# EAGLE board myschematic (EAGLE 4.15)
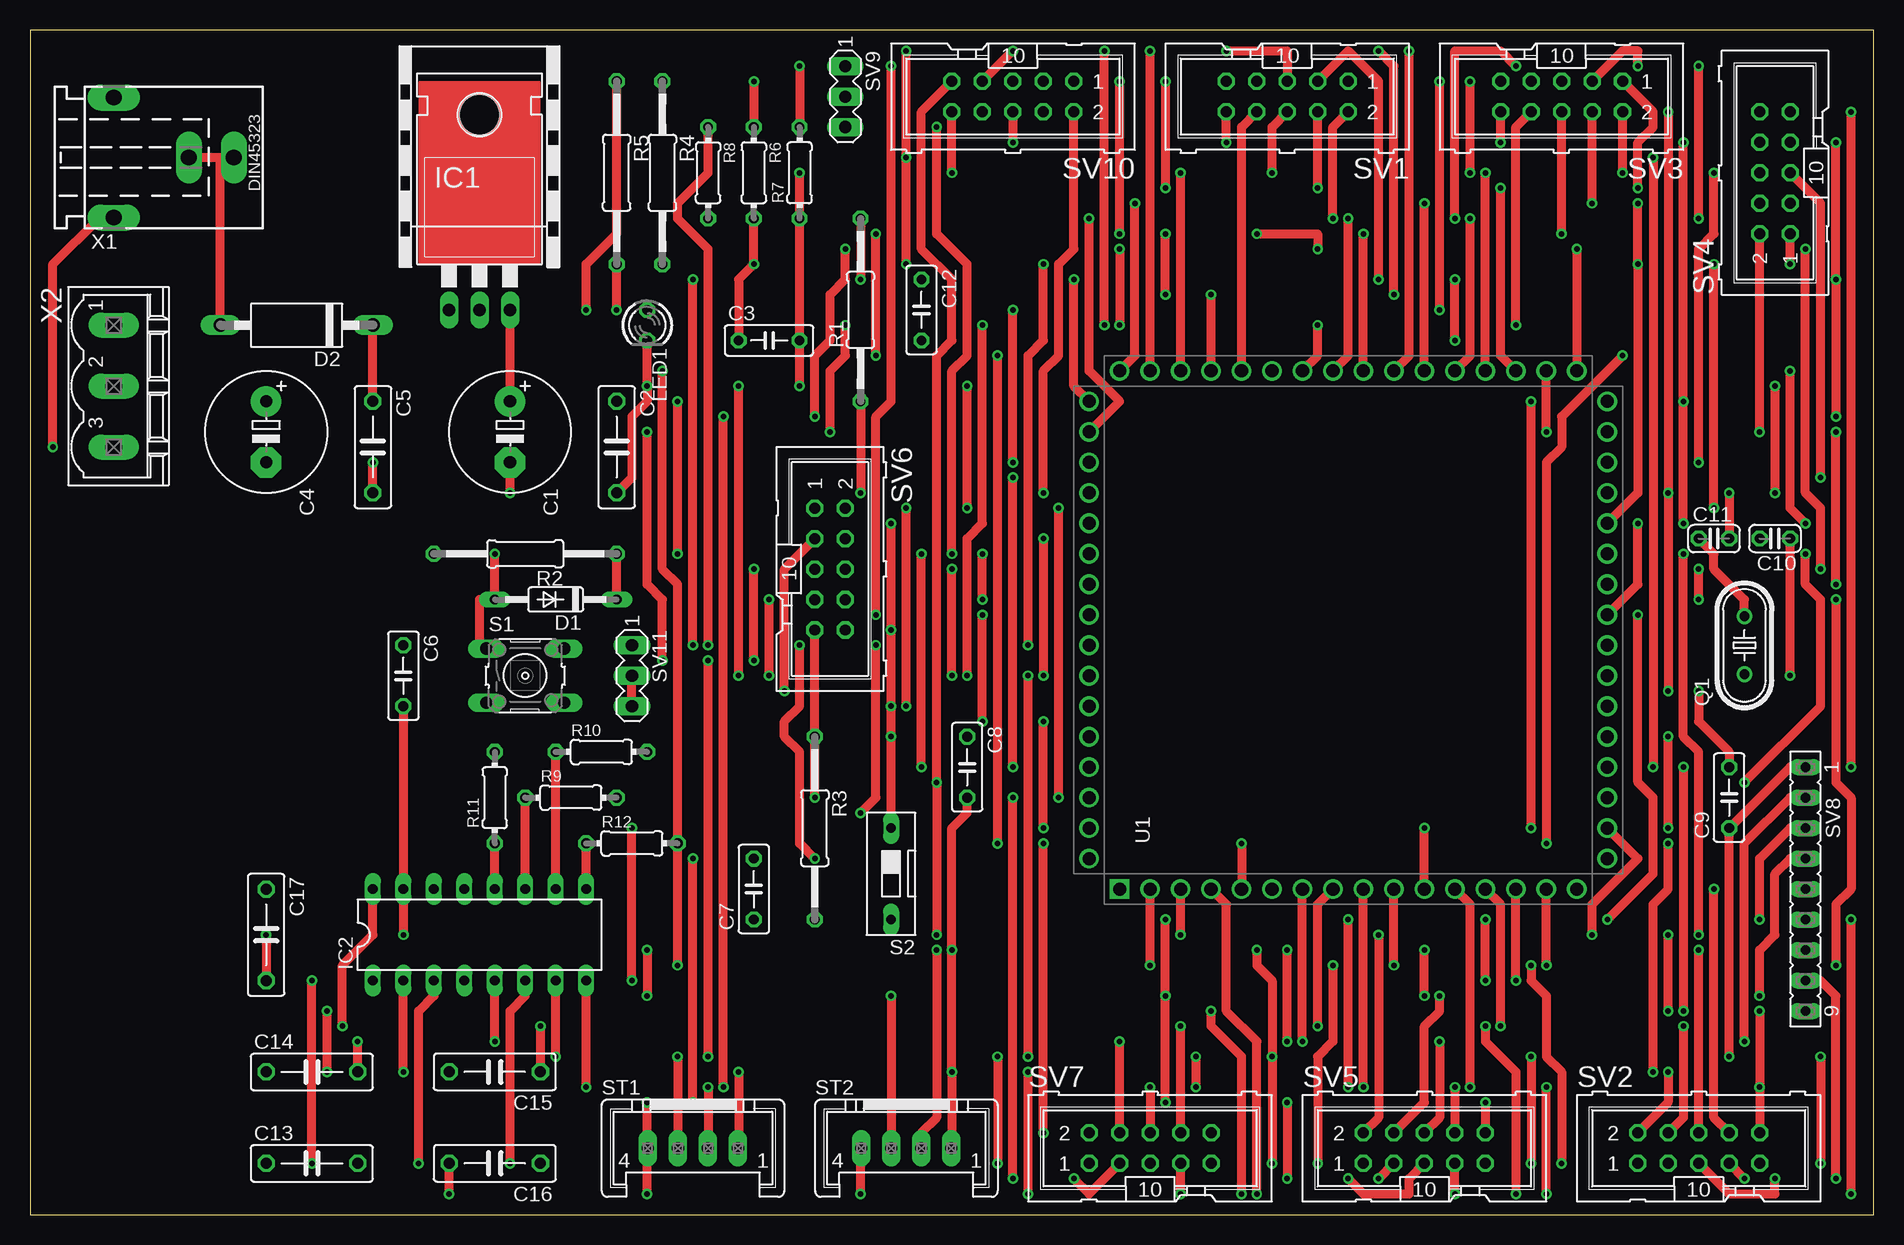
[diagram p0: board, top side]
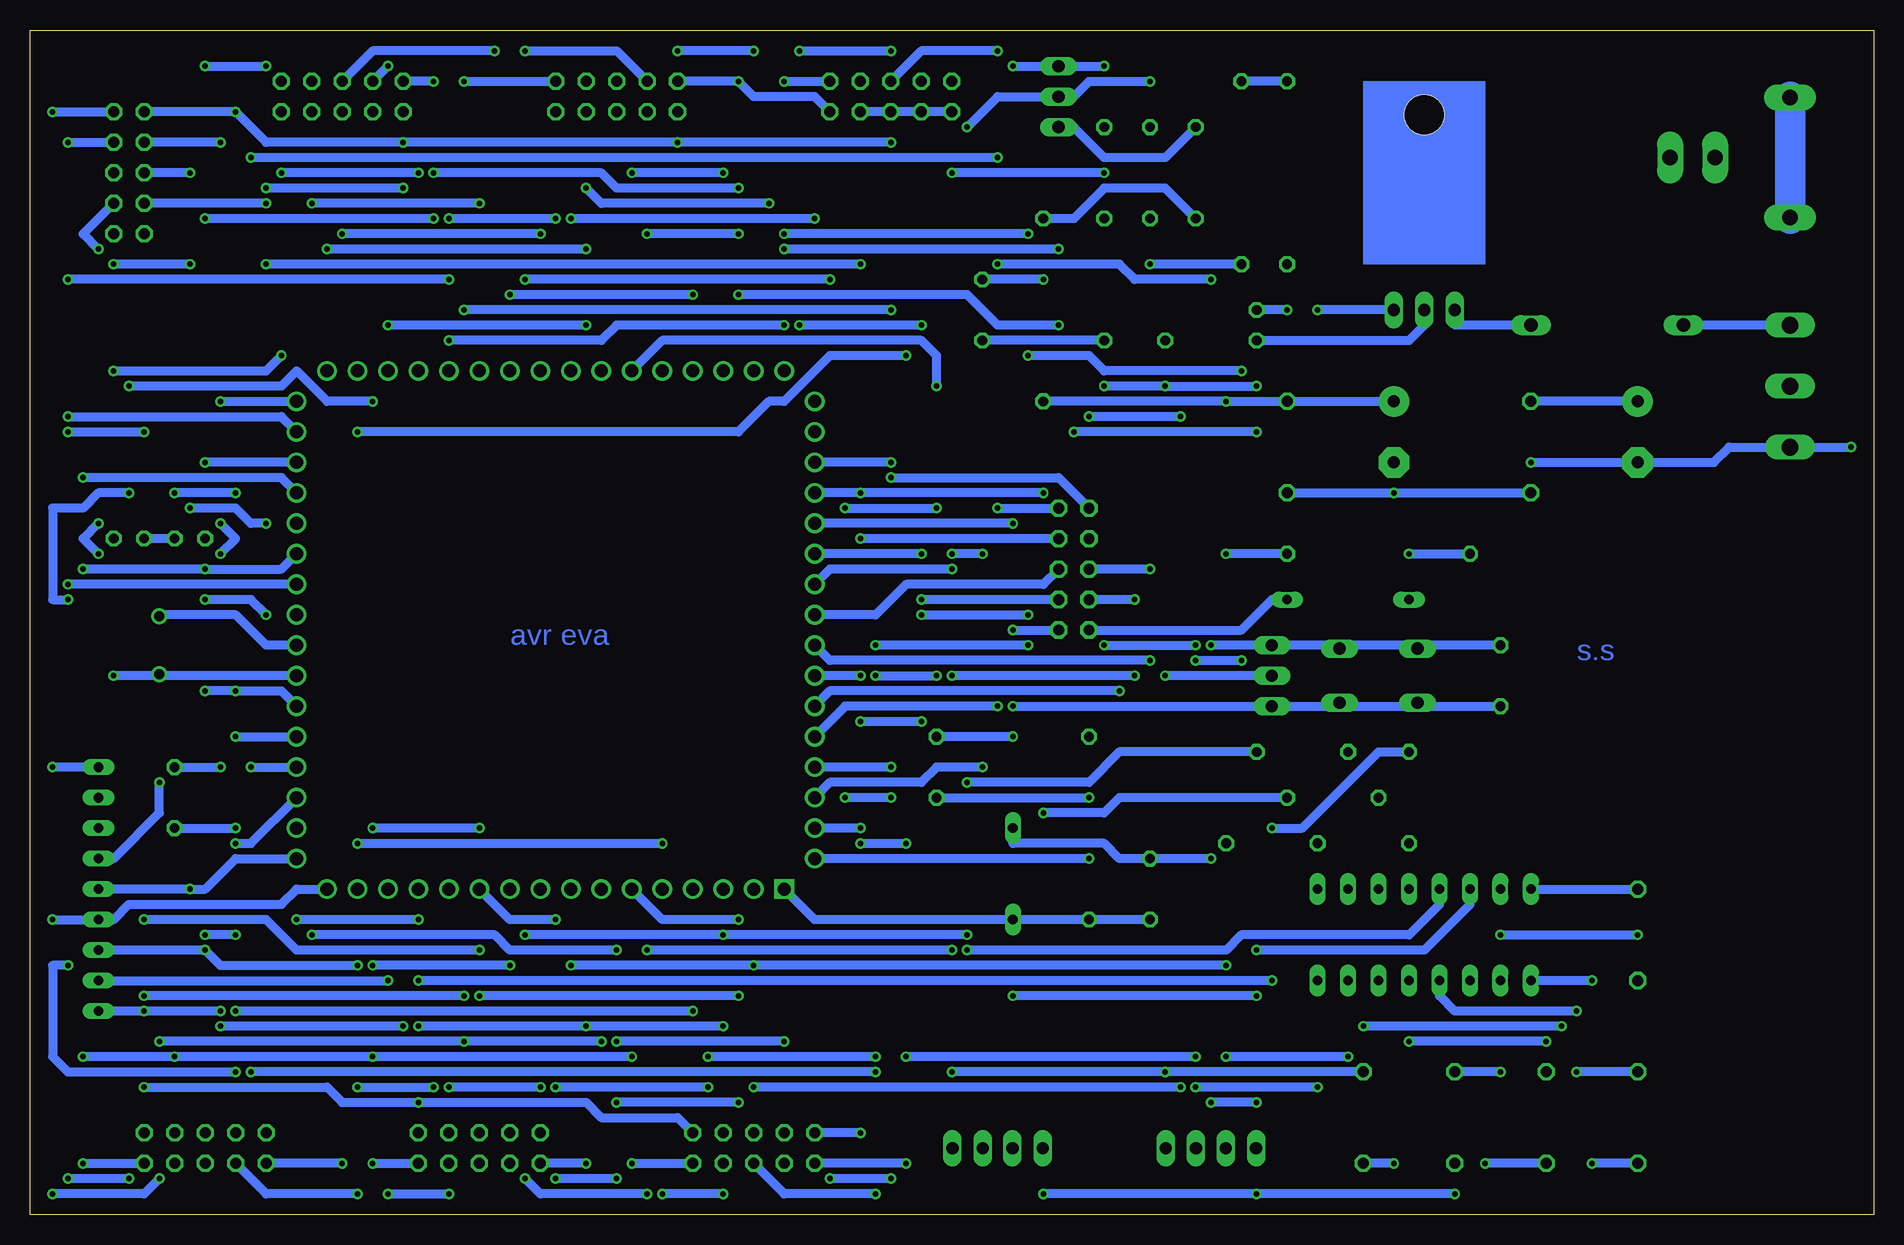
[diagram p1: board, bottom side, seen from below]

Size 153.65 x 98.73 mm. Coordinates in mm from the lower left corner, seen from the top.
Outline: 0,0 153.65,0 153.65,98.73 0,98.73 0,0
Copper layers (1*16): Top 0.035mm / dielectric 1.5mm / Bottom 0.035mm
Design rules "default": minimum track width 30mil, minimum drill 18mil, track to track 16mil, track to pad 16mil, pad to pad 16mil, via to via 16mil, smd to smd 8mil, copper to edge 20mil, drill to drill 8mil, minimum pad ring 10mil, minimum via ring 8mil, stop-mask expansion 1mil, vias tented up to drill 4mil, thermal gap 25mil
Net classes: 0 default: width 0.102 mm, drill 0.025 mm, clearance 0.025 mm
tRestrict: area 1.9,1.7 to 14.6,55.1; area 29.8,77.9 to 45.1,98.3; area 14.6,30.9 to 23.5,55.1
bRestrict: area 1.9,1.7 to 14.6,55.1; area 29.8,77.9 to 45.1,98.3; area 14.6,30.9 to 23.5,55.1
vRestrict: area 1.9,1.7 to 14.6,55.1; area 29.8,77.9 to 45.1,98.3; area 14.6,30.9 to 23.5,55.1

## Footprints (pad centres in the part's own frame; a part is rotated, then mirrored left to right if it is on the bottom)
E5-10,5 = drill 1.016 pad 2.54 round: + -2.54,0 | drill 1.016 pad 2.54 octagon: - 2.54,0
C075-032X103 = drill 0.914 octagon: 1 -3.81,0; 2 3.81,0
C050-025X075 = drill 0.813 octagon: 1 -2.54,0; 2 2.54,0
C025-024X044 = drill 0.813 octagon: 1 -1.27,0; 2 1.27,0
DO35-10 = drill 0.813 long: A 5.08,0; C -5.08,0
DO15-12 = drill 1.118 long: A 6.35,0; C -6.35,0
78XXH = drill 1.016 long: GND 0,-5.08; IN -2.54,-5.08; OUT 2.54,-5.08 | hole 3.302: 0,11.176
DIL16 = drill 0.813 long: 1 -8.89,-3.81; 2 -6.35,-3.81; 3 -3.81,-3.81; 4 -1.27,-3.81; 5 1.27,-3.81; 6 3.81,-3.81; 7 6.35,-3.81; 8 8.89,-3.81; 9 8.89,3.81; 10 6.35,3.81; 11 3.81,3.81; 12 1.27,3.81; 13 -1.27,3.81; 14 -3.81,3.81; 15 -6.35,3.81; 16 -8.89,3.81
LED3MM = drill 0.813 octagon: A -1.27,0; K 1.27,0
HC49U-V = drill 0.813 round: 1 -2.413,0; 2 2.413,0
0207/15 = drill 0.813 octagon: 1 -7.62,0; 2 7.62,0
0204/7 = drill 0.813 octagon: 1 -3.81,0; 2 3.81,0
B3F-10XX = drill 1.016 long: 1 -3.251,2.261; 2 3.251,2.261; 3 -3.251,-2.261; 4 3.251,-2.261
DS-01 = drill 0.813 long: 1 0,-3.81; 2 0,3.81
MSF4 = drill 1.016 long: 1 3.759,-2.54; 2 1.245,-2.54; 3 -1.245,-2.54; 4 -3.759,-2.54
ML10 = drill 0.914 octagon: 1 -5.08,-1.27; 2 -5.08,1.27; 3 -2.54,-1.27; 4 -2.54,1.27; 5 0,-1.27; 6 0,1.27; 7 2.54,-1.27; 8 2.54,1.27; 9 5.08,-1.27; 10 5.08,1.27
FE09 = drill 0.813 long: 1 -10.16,0; 2 -7.62,0; 3 -5.08,0; 4 -2.54,0; 5 0,0; 6 2.54,0; 7 5.08,0; 8 7.62,0; 9 10.16,0
MA03-1 = drill 1.016 long: 1 -2.54,0; 2 0,0; 3 2.54,0
HEADER_SQR64_43 = drill 1.092 square: 1 -21.59,19.05 | drill 1.092 round: 2 -21.59,16.51; 3 -21.59,13.97; 4 -21.59,11.43; 5 -21.59,8.89; 6 -21.59,6.35; 7 -21.59,3.81; 8 -21.59,1.27; 9 -21.59,-1.27; 10 -21.59,-3.81; 11 -21.59,-6.35; 12 -21.59,-8.89; 13 -21.59,-11.43; 14 -21.59,-13.97; 15 -21.59,-16.51; 16 -21.59,-19.05; 17 -19.05,-21.59; 18 -16.51,-21.59; 19 -13.97,-21.59; 20 -11.43,-21.59; 21 -8.89,-21.59; 22 -6.35,-21.59; 23 -3.81,-21.59; 24 -1.27,-21.59; 25 1.27,-21.59; 26 3.81,-21.59; 27 6.35,-21.59; 28 8.89,-21.59; 29 11.43,-21.59; 30 13.97,-21.59; 31 16.51,-21.59; 32 19.05,-21.59; 33 21.59,-19.05; 34 21.59,-16.51; 35 21.59,-13.97; 36 21.59,-11.43; 37 21.59,-8.89; 38 21.59,-6.35; 39 21.59,-3.81; 40 21.59,-1.27; 41 21.59,1.27; 42 21.59,3.81; 43 21.59,6.35; 44 21.59,8.89; 45 21.59,11.43; 46 21.59,13.97; 47 21.59,16.51; 48 21.59,19.05; 49 19.05,21.59; 50 16.51,21.59; 51 13.97,21.59; 52 11.43,21.59; 53 8.89,21.59; 54 6.35,21.59; 55 3.81,21.59; 56 1.27,21.59; 57 -1.27,21.59; 58 -3.81,21.59; 59 -6.35,21.59; 60 -8.89,21.59; 61 -11.43,21.59; 62 -13.97,21.59; 63 -16.51,21.59; 64 -19.05,21.59
737992-5 = drill 1.3 pad 2.184 long: + 0,10; -1 5,0; -2 -5,0; K 0,6.25
MSTBV3 = drill 1.397 long: 1 -5.08,0; 2 0,0; 3 5.08,0

## Placement (x,y rotation side)
C1  [E5-10,5]  40,65.24 270 top
C2  [C075-032X103]  48.89,63.97 270 top
C3  [C050-025X075]  61.59,72.86 0 top
C4  [E5-10,5]  19.68,65.24 270 top
C5  [C075-032X103]  28.57,63.97 270 top
C6  [C050-025X075]  31.11,44.92 270 top
C7  [C050-025X075]  60.32,27.14 90 top
C8  [C050-025X075]  78.1,37.3 270 top
C9  [C050-025X075]  141.6,34.76 90 top
C10  [C025-024X044]  145.41,56.35 180 top
C11  [C025-024X044]  140.33,56.35 0 top
C12  [C050-025X075]  74.29,75.4 270 top
C13  [C075-032X103]  23.49,4.28 0 top
C14  [C075-032X103]  23.49,11.9 0 top
C15  [C075-032X103]  38.73,11.9 180 top
C16  [C075-032X103]  38.73,4.28 180 top
C17  [C075-032X103]  19.68,23.33 270 top
D1  1N4148  [DO35-10]  43.81,51.27 180 top
D2  1N5060GP  [DO15-12]  22.22,74.13 180 top
IC1  REG  [78XXH]  37.46,80.48 0 top
IC2  MAX232  [DIL16]  37.46,23.33 0 top
LED1  [LED3MM]  51.43,74.13 270 top
Q1  [HC49U-V]  142.87,47.46 90 top
R1  [0207/15]  69.21,75.4 90 top
R2  [0207/15]  41.27,55.08 180 top
R3  [0207/15]  65.4,32.22 270 top
R4  [0207/15]  52.7,86.83 270 top
R5  [0207/15]  48.89,86.83 270 top
R6  [0204/7]  60.32,86.83 270 top
R7  [0204/7]  64.13,86.83 90 top
R8  [0204/7]  56.51,86.83 270 top
R9  [0204/7]  45.08,34.76 0 top
R10  [0204/7]  47.62,38.57 0 top
R11  [0204/7]  38.73,34.76 90 top
R12  [0204/7]  50.16,30.95 0 top
S1  [B3F-10XX]  41.27,44.92 0 top
S2  [DS-01]  71.75,28.41 180 top
ST1  MSF4  [MSF4]  55.24,8.09 0 top
ST2  MSF4  [MSF4]  73.02,8.09 0 top
SV1  PORTA  [ML10]  104.77,93.18 180 top
SV2  PORTB  [ML10]  139.06,5.55 0 top
SV3  PORTC  [ML10]  127.63,93.18 180 top
SV4  PORTD  [ML10]  145.41,86.83 90 top
SV5  PORTE  [ML10]  116.2,5.55 0 top
SV6  PORTF  [ML10]  66.67,53.81 270 top
SV7  PORTG/T  [ML10]  93.34,5.55 0 top
SV8  OC  [FE09]  147.95,27.14 270 top
SV9  [MA03-1]  67.94,93.18 270 top
SV10  PROG  [ML10]  81.91,93.18 180 top
SV11  RESET  [MA03-1]  50.16,44.92 270 top
U1  ATMEGA128_SINGLE64_43  [HEADER_SQR64_43]  109.85,48.73 90 top
X1  [737992-5]  6.98,88.1 270 top
X2  MSTBV3  [MSTBV3]  6.98,69.05 270 top

## Library data of the parts
C1-C17 R1-R12 = rcl
D1 D2 = diode
IC1 = 78xx_with_heatsink
IC2 = maxim
LED1 = led
Q1 = crystal
S1 = switch-omron
S2 = switch-dil
ST1 ST2 = con-lumberg
SV1-SV7 SV10 = con-harting-ml
SV8 = con-lsta
SV9 SV11 = con-lstb
U1 = atmel_prototype_header
X1 = con-conrad
X2 = con-phoenix-508

## Nets
AGND: R7.2 SV9.1 U1.63
AL: D2.A X1.+ X1.K X2.1
AREF: R6.1 SV9.2 U1.62
AVCC: R8.1 SV9.3 U1.64
C1+: C13.1 IC2.1
C1-: C13.2 IC2.3
C2+: C14.1 IC2.4
C2-: C14.2 IC2.5
GND: C1.- C2.2 C3.2 C4.- C5.2 C6.2 C7.2 C8.1 C9.2 C10.2 C11.2 C12.2 C16.2 C17.2 IC1.GND IC2.15 LED1.K R7.1 S1.3 S1.4 S2.1 ST1.4 ST2.4 SV1.10 SV2.10 SV3.10 SV4.10 SV5.10 SV6.10 SV7.10 SV8.9 SV10.4 SV10.6 SV10.8 SV10.10 SV11.2 SV11.3 U1.22 U1.53 X1.-1 X2.3
LED: LED1.A R5.2
PA0: SV1.1 U1.51
PA1: SV1.2 U1.50
PA2: SV1.3 U1.49
PA3: SV1.4 U1.48
PA4: SV1.5 U1.47
PA5: SV1.6 U1.46
PA6: SV1.7 U1.45
PA7: SV1.8 U1.44
PB0: SV2.1 U1.10
PB1: SV2.2 SV10.7 U1.11
PB2: SV2.3 U1.12
PB3: SV2.4 U1.13
PB4: SV2.5 SV8.8 U1.14
PB5: SV2.6 SV8.7 U1.15
PB6: SV2.7 SV8.6 U1.16
PB7: SV2.8 SV8.5 U1.17
PC0: SV3.1 U1.35
PC1: SV3.2 U1.36
PC2: SV3.3 U1.37
PC3: SV3.4 U1.38
PC4: SV3.5 U1.39
PC5: SV3.6 U1.40
PC6: SV3.7 U1.41
PC7: SV3.8 U1.42
PD0: SV4.1 U1.25
PD1: SV4.2 U1.26
PD2: R11.2 SV4.3 U1.27
PD3: R9.2 SV4.4 U1.28
PD4: SV4.5 U1.29
PD5: SV4.6 U1.30
PD6: SV4.7 SV7.6 U1.31
PD7: SV4.8 SV7.7 U1.32
PE0: R12.2 SV5.1 SV10.1 U1.2
PE1: R10.2 SV5.2 SV10.9 U1.3
PE2: SV5.3 U1.4
PE3: SV5.4 SV8.4 U1.5
PE4: SV5.5 SV8.3 U1.6
PE5: SV5.6 SV8.2 U1.7
PE6: SV5.7 SV7.8 U1.8
PE7: SV5.8 U1.9
PEN: C7.1 R3.2 S2.2 U1.1
PF0: SV6.1 U1.61
PF1: SV6.2 U1.60
PF2: SV6.3 U1.59
PF3: SV6.4 U1.58
PF4: SV6.5 U1.57
PF5: SV6.6 U1.56
PF6: SV6.7 U1.55
PF7: SV6.8 U1.54
PG0: SV7.1 U1.33
PG1: SV7.2 U1.34
PG2: SV7.3 U1.43
PG3: SV7.4 U1.18
PG4: SV7.5 U1.19
R1IN: IC2.13 ST2.2
R1OUT: IC2.12 R11.1
R2IN: IC2.8 ST1.2
R20OUT: IC2.9 R12.1
RECT: C4.+ C5.1 D2.C IC1.IN
REF: C3.1 R4.2 R6.2
RESET: C6.1 D1.A R2.2 S1.1 S1.2 SV10.5 SV11.1 U1.20
T1IN: IC2.11 R9.1
T1OUT: IC2.14 ST2.3
T2IN: IC2.10 R10.1
T2OUT: IC2.7 ST1.3
V+: C15.2 IC2.2
V-: C16.1 IC2.6
VCC: C1.+ C2.1 C8.2 C9.1 C15.1 C17.1 D1.C IC1.OUT IC2.16 R1.1 R2.1 R3.1 R4.1 R5.1 ST1.1 ST2.1 SV1.9 SV2.9 SV3.9 SV4.9 SV5.9 SV6.9 SV7.9 SV8.1 SV10.2 U1.21 U1.52
VCCREF: C12.1 R1.2 R8.2
XTAL1: C11.1 Q1.2 U1.24
XTAL2: C10.1 Q1.1 U1.23

## Tracks (layer width: path | path; a pad name or v marks a point on that pad's centre or on a via)
AGND  (via drill 0.46)
  Top 0.762: v64.13,95.72 R7.2 | v84.45,32.22 v84.45,41.11 | v79.37,41.11 v79.37,50 | v70.48,50 70.48,66.51 71.75,67.78 v71.75,95.72
  Bottom 0.762: v64.13,95.72 SV9.1 v71.75,95.72 | v84.45,32.22 U1.63 | v84.45,41.11 v79.37,41.11 | v79.37,50 v70.48,50
AL
  Top 0.762: 15.87,88.1 X1.+ 17.14,88.1 | 15.87,88.1 X1.K | D2.A 15.87,88.1
  Bottom 0.762: X2.1 D2.A
AREF  (via drill 0.46)
  Top 0.762: v60.32,94.45 R6.1 | v74.29,37.3 v74.29,55.08 | v76.83,55.08 76.83,70.32 78.1,71.59 78.1,79.21 75.56,81.75 v75.56,90.64
  Bottom 0.762: v60.32,94.45 65.4,94.45 66.67,93.18 SV9.2 73.02,93.18 v75.56,90.64 | U1.62 86.99,36.03 79.37,36.03 78.1,37.3 v74.29,37.3 | v74.29,55.08 v76.83,55.08
AVCC  (via drill 0.46)
  Top 0.762: v65.4,29.68 64.13,30.95 64.13,38.57 62.86,39.84 62.86,41.11 64.13,42.38 v64.13,47.46 | v56.51,47.46 56.51,80.48 53.97,83.02 53.97,84.29 56.51,86.83 R8.1
  Bottom 0.762: R8.1 59.05,88.1 64.13,88.1 66.67,90.64 SV9.3 | v65.4,29.68 U1.64 | v64.13,47.46 v56.51,47.46
C1+  (via drill 0.46)
  Top 0.762: v23.49,4.28 v23.49,19.52
  Bottom 0.762: v23.49,19.52 IC2.1 | C13.1 v23.49,4.28
C1-  (via drill 0.46)
  Top 0.762: v32.38,4.28 32.38,16.98 33.65,18.25 IC2.3
  Bottom 0.762: C13.2 v32.38,4.28
C2+  (via drill 0.46)
  Top 0.762: v24.76,11.9 v24.76,16.98
  Bottom 0.762: v24.76,16.98 34.92,16.98 36.19,18.25 IC2.4 | C14.1 v24.76,11.9
C2-  (via drill 0.46)
  Top 0.762: C14.2 v27.3,14.44 | v38.73,14.44 IC2.5
  Bottom 0.762: v27.3,14.44 v38.73,14.44
GND  (via drill 0.46)
  Top 0.762: v136.52,43.65 v136.52,60.16 v136.52,91.91 | v141.6,60.16 C11.2 | v121.28,9.36 SV5.10 | v137.79,37.3 v137.79,16.98 | v144.14,16.98 v144.14,10.63 SV2.10 | v139.06,43.65 139.06,41.11 141.6,38.57 C9.2 | SV11.3 SV11.2 | C6.2 IC2.15 v31.11,23.33 | v19.68,23.33 C17.2 | v34.92,1.74 C16.2 | v51.43,1.74 51.43,4.28 ST1.4 51.43,6.82 v51.43,9.36 | v69.21,1.74 69.21,4.28 ST2.4 | S2.1 v71.75,39.84 v71.75,42.38 v71.75,48.73 v71.75,57.62 | v55.24,9.36 v55.24,29.68 | v40,60.16 C1.- | v1.9,63.97 1.9,79.21 5.71,83.02 X1.-1 | C5.2 v28.57,62.7 | v99.69,89.37 SV1.10 | SV10.6 v81.91,89.37 | v122.55,89.37 SV3.10 | LED1.K v51.43,69.05 51.43,67.78 50.16,66.51 50.16,61.43 C2.2 | v64.13,69.05 C3.2 R7.1 v64.13,86.83 | v76.83,86.83 SV10.10 | v59.05,44.92 v59.05,69.05
  Bottom 0.762: C11.2 C10.2 | SV4.10 v136.52,91.91 133.98,89.37 v122.55,89.37 v99.69,89.37 v81.91,89.37 | U1.22 132.71,43.65 v136.52,43.65 v139.06,43.65 | v136.52,60.16 v141.6,60.16 | SV7.10 99.69,8.09 106.04,8.09 107.31,9.36 v121.28,9.36 127.63,9.36 128.9,10.63 v144.14,10.63 | C9.2 v137.79,37.3 | v137.79,16.98 v144.14,16.98 SV8.9 | v31.11,23.33 v19.68,23.33 | C6.2 37.46,42.38 S1.3 38.73,42.38 43.81,42.38 S1.4 45.08,42.38 SV11.3 v71.75,42.38 | v34.92,1.74 v51.43,1.74 v69.21,1.74 | v71.75,48.73 SV6.10 | S2.1 71.75,30.95 64.13,30.95 62.86,29.68 C7.2 v55.24,29.68 | v71.75,39.84 C8.1 | v71.75,57.62 U1.53 | v51.43,9.36 v55.24,9.36 | C2.2 v40,60.16 C5.2 | v1.9,63.97 X2.3 12.06,63.97 13.33,62.7 C4.- v28.57,62.7 | SV10.10 SV10.8 SV10.6 SV10.4 | v64.13,69.05 v59.05,69.05 v51.43,69.05 | C3.2 C12.2 | LED1.K 38.73,72.86 37.46,74.13 IC1.GND | v64.13,86.83 v76.83,86.83 | SV11.2 v59.05,44.92
LED  (via drill 0.46)
  Top 0.762: v48.89,75.4 R5.2
  Bottom 0.762: v48.89,75.4 LED1.A
N$58
  Bottom 2.54: 6.98,83.02 6.98,93.18
PA0  (via drill 0.46)
  Top 0.762: v117.47,75.4 v117.47,94.45 | v81.91,62.7 v81.91,75.4
  Bottom 0.762: v117.47,94.45 SV1.1 | v81.91,75.4 v117.47,75.4 | v81.91,62.7 U1.51
PA1  (via drill 0.46)
  Top 0.762: SV1.2 108.58,90.64 v108.58,83.02 | v88.26,83.02 88.26,70.32 90.8,67.78 U1.50
  Bottom 0.762: v88.26,83.02 v108.58,83.02
PA2  (via drill 0.46)
  Top 0.762: SV1.3 109.85,96.99 112.39,94.45 v112.39,77.94 | v86.99,77.94 86.99,69.05 U1.49
  Bottom 0.762: v86.99,77.94 v112.39,77.94
PA3  (via drill 0.46)
  Top 0.762: U1.48 92.07,71.59 v92.07,84.29 | v107.31,85.56 SV1.4
  Bottom 0.762: v92.07,84.29 106.04,84.29 v107.31,85.56
PA4  (via drill 0.46)
  Top 0.762: U1.47 v93.34,96.99 | v99.69,96.99 104.77,96.99 SV1.5
  Bottom 0.762: v93.34,96.99 v99.69,96.99
PA5  (via drill 0.46)
  Top 0.762: U1.46 v95.88,86.83 | v103.5,86.83 103.5,90.64 SV1.6
  Bottom 0.762: v95.88,86.83 v103.5,86.83
PA6  (via drill 0.46)
  Top 0.762: U1.45 v98.42,76.67 | v113.66,76.67 113.66,95.72 v112.39,96.99
  Bottom 0.762: v98.42,76.67 v113.66,76.67 | v112.39,96.99 104.77,96.99 SV1.7
PA7
  Top 0.762: U1.44 100.96,90.64 SV1.8
PB0  (via drill 0.46)
  Top 0.762: v127.63,4.28 127.63,11.9 126.36,13.17 126.36,18.25 125.09,19.52 v125.09,20.79 | v113.66,20.79 U1.10
  Bottom 0.762: v127.63,4.28 SV2.1 | v113.66,20.79 v125.09,20.79
PB1  (via drill 0.46)
  Top 0.762: v109.85,10.63 v109.85,24.6 | v97.15,13.17 v97.15,10.63 | v83.18,13.17 v83.18,44.92 | v78.1,44.92 78.1,56.35 79.37,57.62 v79.37,74.13 | v89.53,74.13 v89.53,96.99 | v81.91,96.99 SV10.7 | SV2.2 136.52,9.36 v136.52,11.9 | v150.49,20.79 150.49,25.87 151.76,27.14 151.76,34.76 150.49,36.03 v150.49,51.27 | v145.41,69.05 v145.41,60.16 | v125.09,32.22 v125.09,67.78 | U1.11 v116.2,32.22
  Bottom 0.762: U1.11 113.66,24.6 v109.85,24.6 | v97.15,10.63 v109.85,10.63 | v83.18,13.17 v97.15,13.17 | v83.18,44.92 v78.1,44.92 | v79.37,74.13 v89.53,74.13 | v89.53,96.99 v81.91,96.99 | v136.52,11.9 150.49,11.9 151.76,13.17 151.76,20.79 v150.49,20.79 | v150.49,51.27 151.76,51.27 151.76,58.89 149.22,58.89 147.95,60.16 v145.41,60.16 | v145.41,69.05 132.71,69.05 131.44,70.32 128.9,67.78 v125.09,67.78 | v116.2,32.22 v125.09,32.22
PB2  (via drill 0.46)
  Top 0.762: v126.36,1.74 v126.36,10.63 | v120.01,10.63 120.01,25.87 U1.12
  Bottom 0.762: SV2.3 133.98,1.74 v126.36,1.74 | v126.36,10.63 v120.01,10.63
PB3  (via drill 0.46)
  Top 0.762: SV2.4 137.79,8.09 v137.79,15.71 | v122.55,15.71 122.55,25.87 U1.13
  Bottom 0.762: v122.55,15.71 v137.79,15.71
PB4  (via drill 0.46)
  Top 0.762: v123.82,19.52 U1.14 | SV2.5 141.6,1.74 145.41,1.74 v145.41,3.01 | v150.49,3.01 150.49,18.25 149.22,19.52 SV8.8
  Bottom 0.762: SV8.8 v123.82,19.52 | v145.41,3.01 v150.49,3.01
PB5  (via drill 0.46)
  Top 0.762: SV2.6 v139.06,22.06 | v126.36,20.79 U1.15
  Bottom 0.762: SV8.7 v139.06,22.06 137.79,20.79 v126.36,20.79
PB6  (via drill 0.46)
  Top 0.762: SV2.7 v142.87,3.01 | v151.76,1.74 v151.76,24.6
  Bottom 0.762: U1.16 131.44,27.14 132.71,25.87 145.41,25.87 146.68,24.6 SV8.6 v151.76,24.6 | v142.87,3.01 144.14,1.74 v151.76,1.74
PB7  (via drill 0.46)
  Top 0.762: SV2.8 140.33,8.09 v140.33,27.14
  Bottom 0.762: U1.17 136.52,29.68 139.06,27.14 v140.33,27.14 SV8.5
PC0  (via drill 0.46)
  Top 0.762: SV3.1 135.25,91.91 135.25,90.64 133.98,89.37 v133.98,85.56 | v122.55,85.56 122.55,71.59 U1.35
  Bottom 0.762: v122.55,85.56 v133.98,85.56
PC1  (via drill 0.46)
  Top 0.762: v132.71,86.83 SV3.2 | U1.36 v121.28,86.83
  Bottom 0.762: v121.28,86.83 v132.71,86.83
PC2  (via drill 0.46)
  Top 0.762: SV3.3 132.71,96.99 133.98,96.99 v133.98,95.72 | v139.06,83.02 v139.06,95.72 | v120.01,83.02 120.01,71.59 U1.37
  Bottom 0.762: v139.06,95.72 v133.98,95.72 | v120.01,83.02 v139.06,83.02
PC3  (via drill 0.46)
  Top 0.762: v130.17,84.29 SV3.4 | U1.38 v116.2,84.29
  Bottom 0.762: v116.2,84.29 v130.17,84.29
PC4  (via drill 0.46)
  Top 0.762: v114.93,96.99 114.93,71.59 U1.39
  Bottom 0.762: SV3.5 125.09,96.99 v114.93,96.99
PC5  (via drill 0.46)
  Top 0.762: v127.63,81.75 SV3.6 | U1.40 v111.12,81.75
  Bottom 0.762: v111.12,81.75 v127.63,81.75
PC6  (via drill 0.46)
  Top 0.762: v123.82,95.72 122.55,96.99 118.74,96.99 v118.74,83.02 | v109.85,83.02 109.85,71.59 U1.41
  Bottom 0.762: v123.82,95.72 SV3.7 | v109.85,83.02 v118.74,83.02
PC7  (via drill 0.46)
  Top 0.762: U1.42 107.31,71.59 v107.31,74.13 | v123.82,74.13 123.82,90.64 SV3.8
  Bottom 0.762: v107.31,74.13 v123.82,74.13
PD0  (via drill 0.46)
  Top 0.762: U1.25 133.98,52.54 v133.98,57.62 | v140.33,58.89 v140.33,79.21 | v146.68,79.21 SV4.1
  Bottom 0.762: v133.98,57.62 135.25,57.62 136.52,58.89 v140.33,58.89 | v140.33,79.21 v146.68,79.21
PD1  (via drill 0.46)
  Top 0.762: v144.14,65.24 SV4.2 | v150.49,52.54 v150.49,65.24
  Bottom 0.762: v150.49,65.24 v144.14,65.24 | U1.26 v150.49,52.54
PD2  (via drill 0.46)
  Top 0.762: v149.22,53.81 149.22,58.89 147.95,60.16 v147.95,80.48 | v50.16,19.52 v50.16,32.22 | v121.28,19.52 v121.28,24.6 | v131.44,24.6 135.25,28.41 135.25,34.76 133.98,36.03 v133.98,50 | v139.06,51.27 v139.06,53.81
  Bottom 0.762: U1.27 132.71,53.81 v139.06,53.81 v149.22,53.81 | v147.95,80.48 149.22,81.75 SV4.3 | R11.2 41.27,38.57 47.62,32.22 v50.16,32.22 | v50.16,19.52 v121.28,19.52 | v121.28,24.6 v131.44,24.6 | v133.98,50 135.25,51.27 v139.06,51.27
PD3  (via drill 0.46)
  Top 0.762: v69.21,33.49 70.48,34.76 v70.48,47.46 | v83.18,47.46 83.18,71.59 84.45,72.86 v84.45,79.21 | v133.98,84.29 v133.98,79.21 133.98,60.16 U1.28
  Bottom 0.762: R9.2 62.86,34.76 64.13,33.49 v69.21,33.49 | v70.48,47.46 v83.18,47.46 | v84.45,79.21 v133.98,79.21 | v133.98,84.29 SV4.4
PD4  (via drill 0.46)
  Top 0.762: SV4.5 149.22,84.29 v149.22,61.43
  Bottom 0.762: v149.22,61.43 132.71,61.43 U1.29
PD5  (via drill 0.46)
  Top 0.762: v140.33,86.83 140.33,81.75 139.06,80.48 v139.06,62.7
  Bottom 0.762: v140.33,86.83 SV4.6 | U1.30 v139.06,62.7
PD6  (via drill 0.46)
  Top 0.762: v150.49,89.37 v150.49,77.94 v150.49,66.51 | v93.34,10.63 SV7.6 | v57.78,10.63 v57.78,66.51 | v65.4,66.51 65.4,71.59 66.67,72.86 66.67,76.67 67.94,77.94 v67.94,80.48 | v90.8,80.48 v90.8,74.13 | v118.74,72.86 v118.74,77.94
  Bottom 0.762: U1.31 132.71,66.51 v150.49,66.51 | v150.49,89.37 SV4.7 | v57.78,10.63 v93.34,10.63 | v57.78,66.51 v65.4,66.51 | v67.94,80.48 v90.8,80.48 | v90.8,74.13 104.77,74.13 106.04,72.86 v118.74,72.86 | v118.74,77.94 v150.49,77.94
PD7  (via drill 0.46)
  Top 0.762: v137.79,89.37 v137.79,67.78 v137.79,57.62 | v95.88,1.74 SV7.7 | v100.96,1.74 100.96,13.17 98.42,15.71 v98.42,16.98 | v136.52,16.98 v136.52,23.33 | v139.06,23.33 139.06,38.57 137.79,39.84 v137.79,55.08
  Bottom 0.762: v137.79,67.78 U1.32 | v137.79,89.37 SV4.8 | v95.88,1.74 v100.96,1.74 | v98.42,16.98 v136.52,16.98 | v136.52,23.33 v139.06,23.33 | v137.79,55.08 136.52,56.35 v137.79,57.62
PE0  (via drill 0.46)
  Top 0.762: v53.97,20.79 R12.2 53.97,52.54 52.7,53.81 v52.7,70.32 | v93.34,20.79 U1.2 | v107.31,4.28 107.31,13.17 108.58,14.44 v108.58,20.79 | v90.8,81.75 v90.8,94.45 | v70.48,71.59 v70.48,81.75
  Bottom 0.762: v53.97,20.79 v93.34,20.79 v108.58,20.79 | v107.31,4.28 SV5.1 | v90.8,94.45 SV10.1 | v70.48,81.75 v90.8,81.75 | v70.48,71.59 65.4,71.59 64.13,70.32 v52.7,70.32
PE1  (via drill 0.46)
  Top 0.762: v75.56,23.33 v75.56,36.03 75.56,71.59 76.83,72.86 76.83,77.94 74.29,80.48 74.29,91.91 SV10.9 | v95.88,23.33 U1.3 | SV5.2 112.39,8.09 v112.39,23.33
  Bottom 0.762: R10.2 62.86,38.57 65.4,36.03 v75.56,36.03 | v75.56,23.33 v95.88,23.33 v112.39,23.33
PE2  (via drill 0.46)
  Top 0.762: v112.39,3.01 SV5.3 | v102.23,1.74 102.23,14.44 99.69,16.98 99.69,25.87 U1.4
  Bottom 0.762: v112.39,3.01 111.12,1.74 v102.23,1.74
PE3  (via drill 0.46)
  Top 0.762: SV5.4 116.2,9.36 116.2,15.71 117.47,16.98 v117.47,18.25 | v144.14,18.25 144.14,22.06 145.41,23.33 145.41,28.41 146.68,29.68 SV8.4 | v100.96,30.95 U1.5 | v126.36,30.95 126.36,62.7 127.63,63.97 127.63,66.51 v132.71,71.59 | v146.68,70.32 146.68,58.89 v147.95,57.62 | v147.95,55.08 147.95,52.54 149.22,51.27 149.22,42.38 v142.87,36.03
  Bottom 0.762: v117.47,18.25 v144.14,18.25 | v126.36,30.95 v100.96,30.95 | v132.71,71.59 133.98,70.32 v146.68,70.32 | v147.95,57.62 149.22,56.35 v147.95,55.08 | v142.87,36.03 142.87,33.49 146.68,29.68 SV8.4
PE4  (via drill 0.46)
  Top 0.762: v94.61,9.36 v94.61,18.25 v94.61,24.6 | v104.77,9.36 v104.77,3.01 | v109.85,3.01 111.12,1.74 114.93,1.74 114.93,3.01 SV5.5 | v144.14,24.6 144.14,29.68 146.68,32.22 SV8.3 | v116.2,18.25 v116.2,22.06
  Bottom 0.762: U1.6 100.96,24.6 v94.61,24.6 | v94.61,9.36 v104.77,9.36 | v104.77,3.01 v109.85,3.01 | v144.14,24.6 133.98,24.6 131.44,22.06 v116.2,22.06 | v94.61,18.25 v116.2,18.25
PE5  (via drill 0.46)
  Top 0.762: SV5.6 117.47,8.09 v117.47,14.44 | v142.87,14.44 142.87,30.95 146.68,34.76 SV8.2 | v106.04,14.44 U1.7
  Bottom 0.762: v142.87,14.44 v117.47,14.44 v106.04,14.44
PE6  (via drill 0.46)
  Top 0.762: SV7.8 v95.88,15.71 | v107.31,15.71 107.31,25.87 U1.8 | v118.74,1.74 SV5.7 | v123.82,1.74 123.82,11.9 121.28,14.44 v121.28,15.71
  Bottom 0.762: v95.88,15.71 v107.31,15.71 v121.28,15.71 | v123.82,1.74 v118.74,1.74
PE7  (via drill 0.46)
  Top 0.762: v118.74,10.63 SV5.8 | v111.12,10.63 U1.9
  Bottom 0.762: v111.12,10.63 v118.74,10.63
PEN
  Bottom 0.762: C7.1 R3.2 S2.2 88.26,24.6 U1.1
PF0  (via drill 0.46)
  Top 0.762: v81.91,37.3 v81.91,61.43
  Bottom 0.762: SV6.1 67.94,61.43 v81.91,61.43 | v81.91,37.3 U1.61
PF1  (via drill 0.46)
  Top 0.762: v73.02,42.38 v73.02,58.89
  Bottom 0.762: v73.02,58.89 SV6.2 | v73.02,42.38 85.72,42.38 U1.60
PF2  (via drill 0.46)
  Top 0.762: SV6.3 62.86,53.81 v62.86,43.65
  Bottom 0.762: v62.86,43.65 86.99,43.65 U1.59
PF3  (via drill 0.46)
  Top 0.762: v84.45,56.35 v84.45,44.92
  Bottom 0.762: SV6.4 v84.45,56.35 | v84.45,44.92 U1.58
PF4  (via drill 0.46)
  Top 0.762: v60.32,46.19 v60.32,53.81
  Bottom 0.762: v60.32,53.81 SV6.5 | v60.32,46.19 86.99,46.19 U1.57
PF5
  Bottom 0.762: SV6.6 69.21,52.54 80.64,52.54 83.18,50 U1.56
PF6  (via drill 0.46)
  Top 0.762: v61.59,44.92 v61.59,51.27 | v76.83,44.92 v76.83,53.81
  Bottom 0.762: v61.59,51.27 SV6.7 | v61.59,44.92 v76.83,44.92 | v76.83,53.81 86.99,53.81 U1.55
PF7  (via drill 0.46)
  Top 0.762: v79.37,51.27 v79.37,55.08
  Bottom 0.762: SV6.8 v79.37,51.27 | v79.37,55.08 U1.54
PG0  (via drill 0.46)
  Top 0.762: v80.64,13.17 v80.64,4.28 | v56.51,13.17 v56.51,46.19 | v52.7,46.19 52.7,51.27 51.43,52.54 v51.43,65.24 | v66.67,65.24 66.67,70.32 67.94,71.59 v67.94,74.13 | v94.61,76.67 v94.61,81.75 | v102.23,81.75 107.31,81.75 v107.31,80.48 | v128.9,80.48 U1.33
  Bottom 0.762: v80.64,4.28 SV7.1 | v56.51,13.17 v80.64,13.17 | v56.51,46.19 v52.7,46.19 | v51.43,65.24 v66.67,65.24 | v67.94,74.13 73.02,74.13 75.56,76.67 v94.61,76.67 | v94.61,81.75 v102.23,81.75 | v107.31,80.48 v128.9,80.48
PG1  (via drill 0.46)
  Top 0.762: v126.36,65.24 U1.34 | v80.64,30.95 v80.64,71.59 | v84.45,6.82 v84.45,30.95
  Bottom 0.762: v126.36,65.24 94.61,65.24 92.07,67.78 90.8,67.78 86.99,71.59 v80.64,71.59 | v84.45,30.95 v80.64,30.95 | v84.45,6.82 SV7.2
PG2  (via drill 0.46)
  Top 0.762: SV7.3 88.26,1.74 v86.99,3.01 | v81.91,3.01 v81.91,34.76 | v85.72,34.76 v85.72,58.89 | v78.1,58.89 v78.1,69.05
  Bottom 0.762: v81.91,3.01 v86.99,3.01 | v81.91,34.76 v85.72,34.76 | v85.72,58.89 v78.1,58.89 | v78.1,69.05 78.1,71.59 79.37,72.86 100.96,72.86 U1.43
PG3  (via drill 0.46)
  Top 0.762: SV7.4 v90.8,14.44 | v104.77,14.44 v104.77,22.06 | v130.17,23.33 130.17,25.87 133.98,29.68 U1.18
  Bottom 0.762: v90.8,14.44 v104.77,14.44 | v104.77,22.06 113.66,22.06 114.93,23.33 v130.17,23.33
PG4  (via drill 0.46)
  Top 0.762: v83.18,1.74 v83.18,11.9 | v135.25,11.9 135.25,25.87 136.52,27.14 v136.52,30.95
  Bottom 0.762: SV7.5 90.8,1.74 v83.18,1.74 | v83.18,11.9 v135.25,11.9 | v136.52,30.95 135.25,30.95 U1.19
R1IN  (via drill 0.46)
  Top 0.762: v75.56,22.06 75.56,8.09 74.29,6.82 ST2.2
  Bottom 0.762: v75.56,22.06 53.97,22.06 52.7,23.33 38.73,23.33 36.19,25.87 IC2.13
R1OUT
  Top 0.762: IC2.12 R11.1
R2IN  (via drill 0.46)
  Top 0.762: v56.51,10.63 56.51,6.82 ST1.2 | v46.35,10.63 IC2.8
  Bottom 0.762: v46.35,10.63 v56.51,10.63
R20OUT
  Top 0.762: IC2.9 R12.1
RECT
  Top 0.762: C5.1 D2.C
  Bottom 0.762: IC1.IN 34.92,74.13 D2.C | C4.+ C5.1
REF  (via drill 0.46)
  Top 0.762: R6.2 v60.32,79.21 59.05,77.94 C3.1
  Bottom 0.762: R4.2 v60.32,79.21
RESET  (via drill 0.46)
  Top 0.762: S1.1 37.46,47.46 37.46,51.27 D1.A v38.73,55.08 | v73.02,79.21 v73.02,88.1 v73.02,96.99 | v55.24,47.46 v55.24,77.94 | v135.25,88.1 v135.25,37.3
  Bottom 0.762: C6.1 37.46,47.46 S1.1 38.73,47.46 43.81,47.46 S1.2 45.08,47.46 SV11.1 v55.24,47.46 | v38.73,55.08 R2.2 | SV10.5 79.37,96.99 v73.02,96.99 | v73.02,79.21 62.86,79.21 61.59,77.94 v55.24,77.94 | v135.25,37.3 U1.20 | v73.02,88.1 v135.25,88.1
T1IN
  Top 0.762: IC2.11 R9.1
T1OUT  (via drill 0.46)
  Top 0.762: v51.43,22.06 v51.43,18.25 | v71.75,18.25 71.75,6.82 ST2.3
  Bottom 0.762: v51.43,22.06 37.46,22.06 33.65,25.87 IC2.14 | v51.43,18.25 v71.75,18.25
T2IN
  Top 0.762: IC2.10 R10.1
T2OUT  (via drill 0.46)
  Top 0.762: v53.97,13.17 53.97,6.82 ST1.3 | v43.81,13.17 IC2.7
  Bottom 0.762: v43.81,13.17 v53.97,13.17
V+  (via drill 0.46)
  Top 0.762: v31.11,11.9 IC2.2
  Bottom 0.762: v31.11,11.9 C15.2
V-  (via drill 0.46)
  Top 0.762: v40,4.28 40,16.98 41.27,18.25 IC2.6
  Bottom 0.762: v40,4.28 C16.1
VCC  (via drill 0.46)
  Top 0.762: SV8.1 146.68,37.3 C9.1 v141.6,13.17 | v103.5,4.28 v103.5,13.17 103.5,19.52 102.23,20.79 v102.23,22.06 | v125.09,13.17 v125.09,4.28 | v149.22,13.17 v149.22,4.28 | v151.76,37.3 v151.76,91.91 | v136.52,32.22 v136.52,39.84 | v59.05,11.9 59.05,6.82 ST1.1 | v26.03,15.71 26.03,20.79 28.57,23.33 IC2.16 | v42.54,15.71 C15.1 | D1.C R2.1 | SV6.9 R3.1 v65.4,34.76 | C8.2 78.1,33.49 76.83,32.22 v76.83,22.06 v76.83,11.9 76.83,6.82 ST2.1 | v120.01,86.83 v120.01,94.45 | v94.61,94.45 v94.61,85.56 | C1.+ IC1.OUT | R1.1 v69.21,60.16 | R5.1 48.89,81.75 46.35,79.21 v46.35,75.4 | SV10.2 86.99,80.48 85.72,79.21 85.72,71.59 84.45,70.32 v84.45,60.16 | v53.97,55.08 v53.97,67.78
  Bottom 0.762: v103.5,4.28 SV7.9 | v103.5,13.17 v125.09,13.17 v141.6,13.17 v149.22,13.17 | v125.09,4.28 SV5.9 | v149.22,4.28 SV2.9 | v151.76,91.91 SV4.9 | SV8.1 v151.76,37.3 | v136.52,39.84 U1.21 | C9.1 v136.52,32.22 | IC2.16 C17.1 | C15.1 v59.05,11.9 v76.83,11.9 | v26.03,15.71 v42.54,15.71 | C8.2 v65.4,34.76 | SV6.9 52.7,48.73 50.16,51.27 D1.C | SV10.2 88.26,93.18 93.34,93.18 v94.61,94.45 SV1.9 | v120.01,94.45 SV3.9 | v120.01,86.83 106.04,86.83 104.77,85.56 v94.61,85.56 | R5.1 R4.1 | C1.+ C2.1 v53.97,67.78 R1.1 | v69.21,60.16 v84.45,60.16 U1.52 | IC1.OUT v46.35,75.4 | R2.1 v53.97,55.08 | v76.83,22.06 v102.23,22.06
VCCREF  (via drill 0.46)
  Top 0.762: R1.2 v69.21,77.94
  Bottom 0.762: R1.2 66.67,83.02 64.13,85.56 59.05,85.56 R8.2 | v69.21,77.94 C12.1
XTAL1
  Top 0.762: C11.1 140.33,55.08 140.33,53.81 142.87,51.27 Q1.2
  Bottom 0.762: U1.24 133.98,47.46 136.52,50 142.87,50 Q1.2
XTAL2  (via drill 0.46)
  Top 0.762: v146.68,44.92 C10.1
  Bottom 0.762: U1.23 142.87,44.92 | 142.87,44.92 v146.68,44.92 | 142.87,44.92 Q1.1
(copper drawn outside any net)
  shapes: Bottom area x1, Top area x1

## Text on the board
Bottom: avr eva | s.s